# Altium PCB PCB_BAD.PcbDoc
Units mil, origin at the board's own origin, x right, y up, seen from the top; angles counter-clockwise.
Board outline 2100 x 3115 mil, 2 copper layers (Top Layer, Bottom Layer), stack 12.8 mil thick; 26 components, 12 nets, 116 pads, 29 vias.
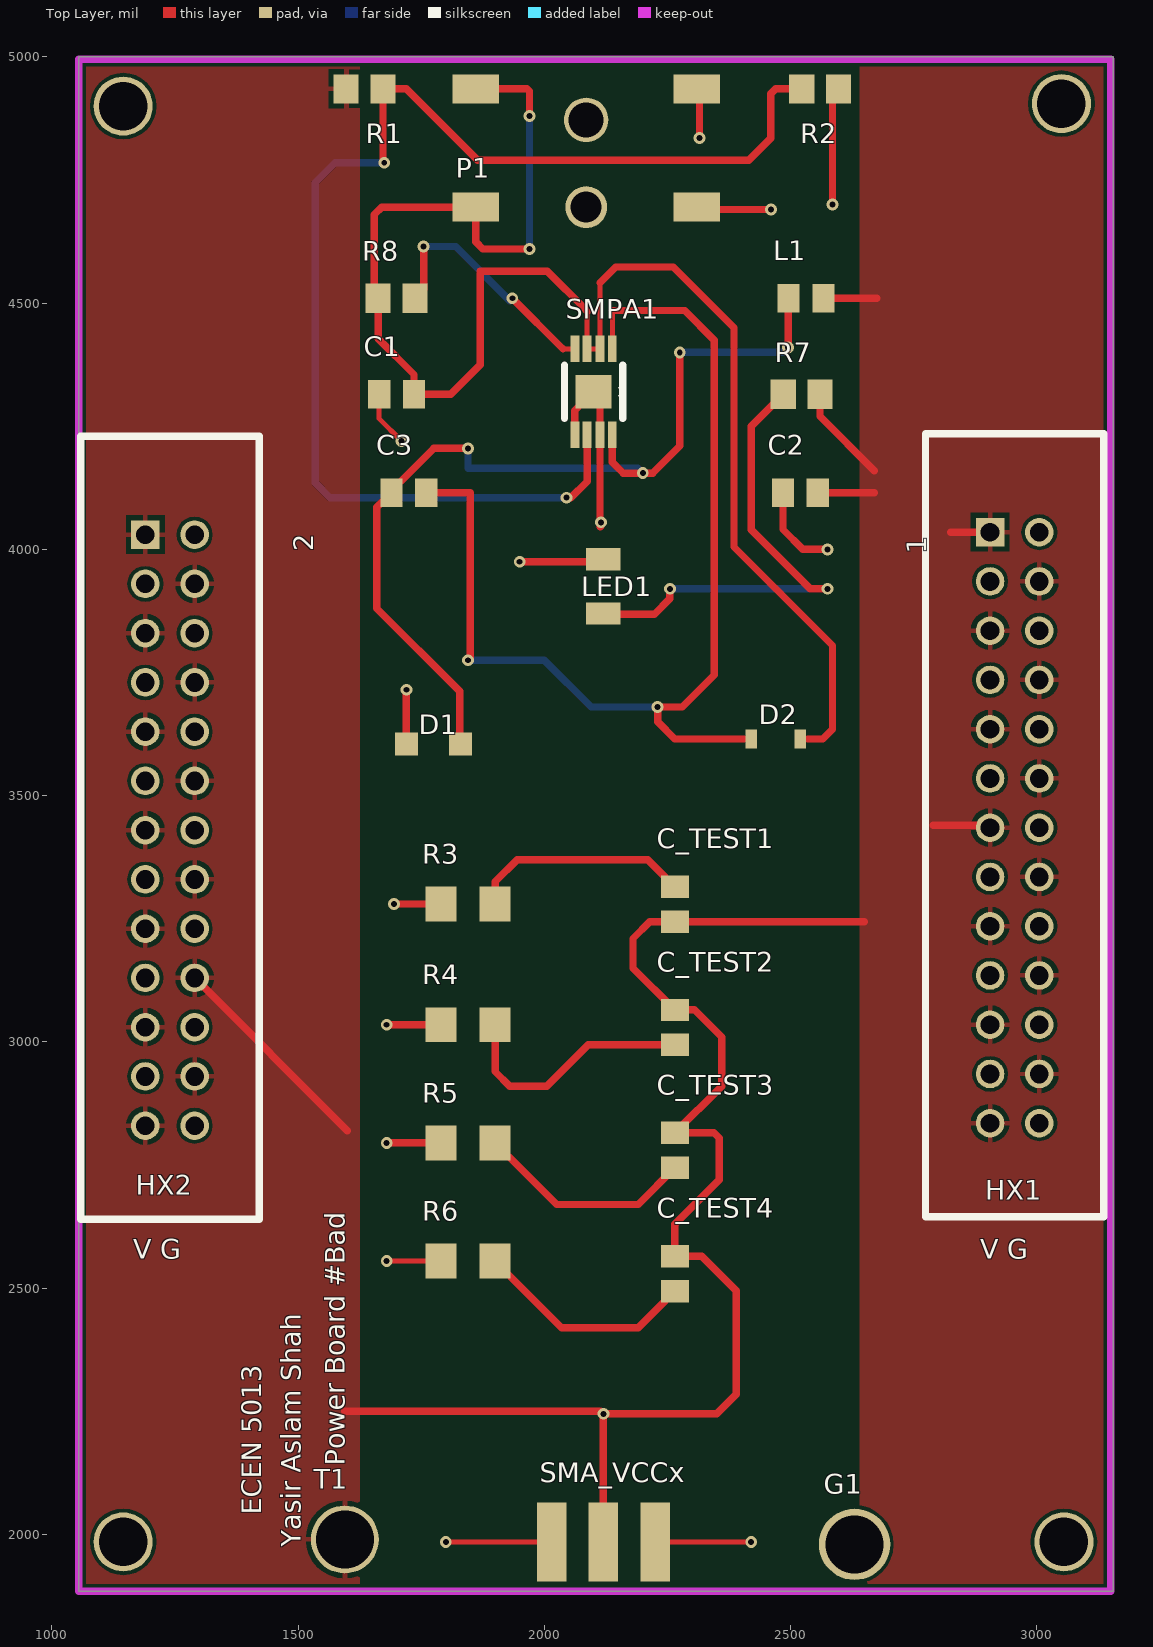
[diagram p0: Top Layer view]
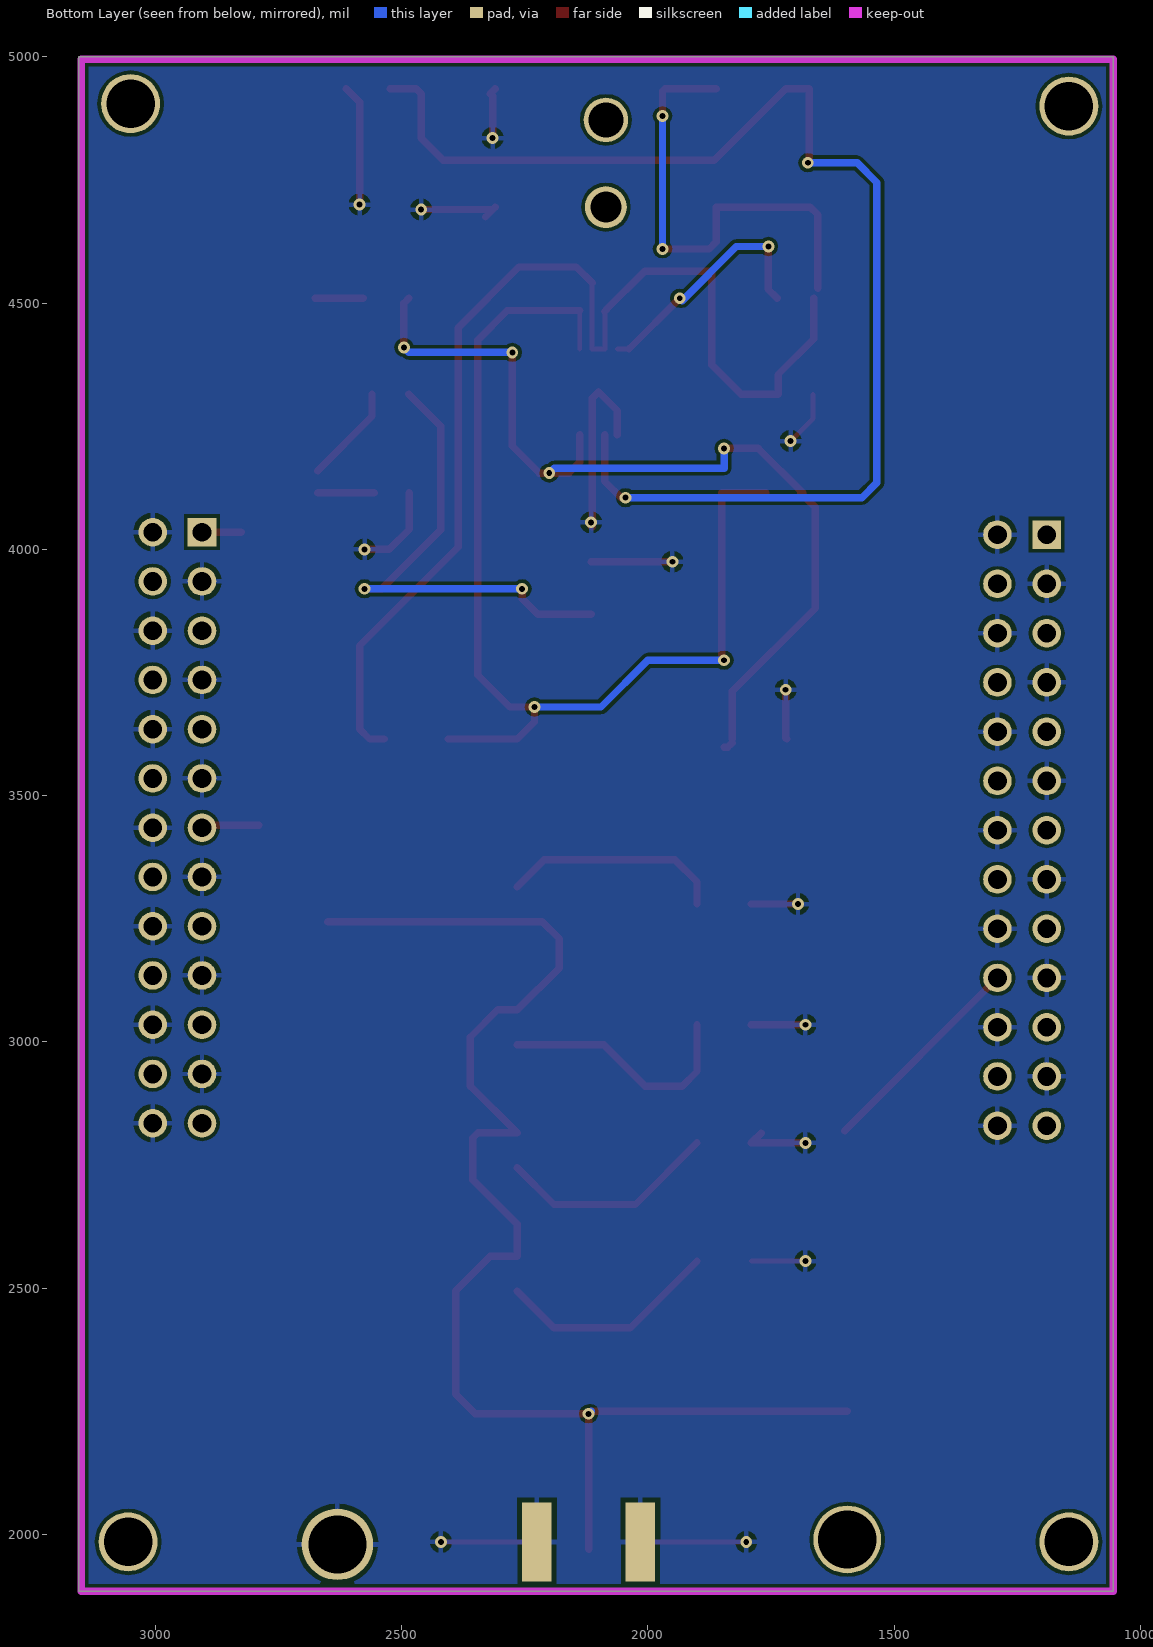
[diagram p1: Bottom Layer view, seen from below]

## Layer stack, top to bottom
Top Solder: solder mask 0.4, Solder Resist, Dk 3.5
Top Layer: signal copper 1.4
Dielectric 1: core 10, FR-4, Dk 4.2
Bottom Layer: signal copper 1.4
Bottom Solder: solder mask 0.4, Solder Resist, Dk 3.5

## Board outline
1055,1885 3155,1885 3155,5000 1055,5000

## Design rules (kind name [scope] priority, off if disabled: settings)
Clearance [All] p1: gap=7 ignorepadtopadclearanceinfootprint=FALSE
HoleSize [All] p1: absolutevalues=TRUE maxlimit=120 minlimit=1 maxpercent=80.000 minpercent=20.000
PolygonConnect [All] p1: connectstyle=Relief reliefconductorwidth=10 reliefentries=4 polygonreliefangle="90 Angle" airgapwidth=10
RoutingVias [All] p1: holewidth=12 width=24 viastyle="Through Hole" minholewidth=12 minwidth=24 maxholewidth=12 maxwidth=24
SolderMaskExpansion [All] p1: expansion=4
Width [All] p1: maxlimit=20 minlimit=10 preferedwidth=10 minimp=50.000000 maximp=50.000000 favimp=50.000000
29 further rules are at their usual default settings.

## Components (designator, comment, footprint, x,y, rotation, side; value= is the part's Value field where it differs from the comment)
C1 "Cap Semi" CAPC2012X140N 1700,4315 r0 top value=10uF
C2 "Cap Semi" CAPC2012X140N 2520,4115 r0 top value=10uF
C3 "Cap Semi" CAPC2012X140N 1725,4115 r0 top value=0.1uF
C_TEST1 "Cap Semi" CAPC2012X140N 2265,3279.57 r90 top value=100uF
C_TEST2 "Cap Semi" CAPC2012X140N 2265,3029.57 r90 top value=10uF
C_TEST3 "Cap Semi" CAPC2012X140N 2265,2780 r90 top value=1uF
C_TEST4 "Cap Semi" CAPC2012X140N 2265,2529.57 r90 top value=0.1uF
D1 "Diode" D11 1920,3575 r0 top
D2 "Diode" D22s 2320,3600 r180 top
G1 "VCCx" "1Pin Header"#1 2630,1980 r0 top
HX1 "" TYCO_1761606-9 3005,4035 r90 top
HX2 "" TYCO_1761606-9 1290,4030 r90 top
L1 "33uH" CAPC2012X140N 2531.26,4510 r0 top
LED1 "LED2" LED_User 2100,3775 r270 top
P1 "Power Jack" CUI_PJ-002AH-SMT-TR 2085,4815 r90 top
R1 "Res3" RESC2012X70 1635,4935 r0 top value=10K
R2 "Res3" RESC2012X70 2560,4935 r0 top value=10K
R3 "0 ohm" RESC3216X65 1844.88,3280 r180 top
R4 "0 ohm" RESC3216X65 1844.88,3035 r180 top
R5 "0 ohm" RESC3216X65 1844.88,2795 r180 top
R6 "0ohm" RESC3216X65 1844.88,2555 r180 top
R7 "Res3" RESC2012X70 2522.4,4315 r0 top value=1K
R8 "Res3" RESC2012X70 1700,4510 r0 top value=100K
SMA_VCCx "SMA1" sma_UserDefined 1860,2125 r180 top
SMPA1 "" SOP65P490X110-9N 2100,4320 r270 top
T1 "VCCx" "1Pin Header"#2 1595,1990 r0 top

## Footprints (in the part's own frame and the unit in brackets; to place one, negate y for a bottom-side part, rotate by r counter-clockwise, add the part's x,y. Pads: shape width x height; smd on the part's side, far side on the other; paste and mask are expansions set on the pad)
"1Pin Header"#1 [mil]
  round 145 hole 118.11: 1(0,0)
"1Pin Header"#2 [mil]
  round 137.8 hole 118.11: 1(0,0)
CAPC2012X140N [mm]
  rect 1.15x1.45 smd: 1(-0.9,0) 2(0.9,0)
CUI_PJ-002AH-SMT-TR [mm]
  rect 1.5x2.4 smd: 1(-3.05,5.7) 1(3.05,5.7) 2(-3.05,-5.7) 3(3.05,-5.7)
  round 2.159 hole 1.6 unplated: None(-3.05,0)
  round 2.286 hole 1.8 unplated: None(1.45,0)
D11 [mm]
  rect 1.2x1.2 smd: 1(-5.08,0.762) 2(-2.286,0.762)
D22s [mm]
  rect 0.59x1 smd: 1(-5.08,-0.381) 2(-2.54,-0.381)
LED_User [mil]
  rect 45x70 smd: 1(-95,20) 2(-205,20)
RESC2012X70 [mm]
  rect 1.3x1.5 smd: 1(-0.95,0) 2(0.95,0)
RESC3216X65 [mm]
  rect 1.6x1.8 smd: 1(-1.4,0) 2(1.4,0)
sma_UserDefined [mil]
  rect 60x160 smd: GND1(-365,140) GND4(-155,140) P(-260,140)
  rect 60x160 smd far side: GND2(-365,140) GND3(-155,140)
SOP65P490X110-9N [mil]
  rect 54x18 smd: 1(-87,38) 2(-87,13) 3(-87,-13) 4(-87,-38) 5(87,-38) 6(87,-13) 7(87,13) 8(87,38)
  rect 68x73 smd: 9(0,0)
  silkscreen extent -54,-59 54,59
TYCO_1761606-9 [mil]
  rect 58x58 hole 38: 1(0,100)
  round 58 hole 38: 2(0,0) 3(-100,100) 4(-100,0) 5(-200,100) 6(-200,0) 7(-300,100) 8(-300,0) 9(-400,100) 10(-400,0) 11(-500,100) 12(-500,0) 13(-600,100) 14(-600,0) 15(-700,100) 16(-700,0) 17(-800,100) 18(-800,0) 19(-900,100) 20(-900,0) 21(-1000,100) 22(-1000,0) 23(-1100,100) 24(-1100,0) 25(-1200,100) 26(-1200,0)
  silkscreen extent -1390,-131 200,231

## Part data
C1 C2 C3 C_TEST1 C_TEST2 C_TEST3 C_TEST4: "Capacitor (Semiconductor SIM Model)", LatestRevisionDate=29-May-2009, LatestRevisionNote="IPC-7351 Footprint Added.", PackageDescription="Chip Capacitor", PackageReference=C1206, Published=8-Jun-2000, Publisher="Altium Limited"
D1 D2: "Default Diode", Code_JEDEC=DO-214-AB, LatestRevisionDate=17-Jul-2002, LatestRevisionNote="Re-released for DXP Platform.", PackageDescription="DO-214-AB/SMC; 2 C-Bend Leads; Body 7.9 x 5.9 mm, inc. leads (LxW)", PackageReference=SMC, PackageVersion=Sep-1996, Published=8-Jun-2000, Publisher="Altium Limited"
G1 T1: library part "1Pin Header"
HX1 HX2: library part 1761606-9, "Header, Pin, Idc, Amp-Latch, 26 Pos, Low Profile, Pcb, Vertical, Black", Package=None, Availability=Good, EU_RoHS_Compliance=Compliant, Link=http://www.te.com/usa-en/product-1761606-9.html, MF="TE Connectivity", MP=1761606-9, Price="4.02 USD", SnapEDA_Link=https://www.snapeda.com/symbols-footprints/1761606-9/TE%20Connectivity%20AMP%20Connectors/view-part/?ref=snap
L1: library part MLP2012H2R2MT0S1, "Inductor Power Shielded Multi-Layer 2.2uH 20% 2MHz Ferrite 1A 195mOhm DCR 0805 Punched Paper T/R", Package="0805 TDK", Availability=Good, MF=TDK, MP=MLP2012H2R2MT0S1, Price="0.18 USD", SnapEDA_Link=https://www.snapeda.com/symbols-footprints/MLP2012H2R2MT0S1/TDK-Lambda%20Americas%20Inc/view-part/?ref=snap
LED1: "Typical RED, GREEN, YELLOW, AMBER GaAs LED", LatestRevisionDate=17-Jul-2002, LatestRevisionNote="Re-released for DXP Platform.", PackageDescription="SM LED; 2 Flat Leads", PackageReference=3.2X1.6X1.1, PackageVersion=Feb-2002, Published=8-Jun-2000, Publisher="Altium Limited"
P1: library part PJ-002AH-SMT-TR, "24 VDC 5 A Surface Mount Unshielded 2 Conductors 3 Contacts Male Power Jack", Package=None, Availability=Good, MF=CUI, MP=PJ-002AH-SMT-TR, Price="1.03 USD", SnapEDA_Link=https://www.snapeda.com/symbols-footprints/PJ-002AH-SMT-TR/CUI%20Inc/view-part/?ref=snap
R1 R2 R7 R8: "Resistor", LatestRevisionDate=29-May-2009, LatestRevisionNote="IPC-7351 Footprint Added.", PackageDescription="Chip Resistor", PackageReference=J1-0603, Published=8-Jun-2000, Publisher="Altium Limited"
R3 R4 R5 R6: library part Res3, "Resistor", LatestRevisionDate=29-May-2009, LatestRevisionNote="IPC-7351 Footprint Added.", PackageDescription="Chip Resistor", PackageReference=J1-0603, Published=8-Jun-2000, Publisher="Altium Limited"
SMA_VCCx: library part 1865, "Edge-Launch SMA Connector for 1.6mm / 0.062 Thick PCBs", Package=None, Availability=Bad, MF=Keystone, MP=1865, Price="2.38 USD", SnapEDA_Link=https://www.snapeda.com/symbols-footprints/1865/Keystone%20Electronics/view-part/?ref=snap
SMPA1: library part LM2738XMY, "Swx Reg, Step d, Dc-Dc, 1.5a, 8soic", Package="SOIC-8 Texas Instruments", Availability=Unavailable, MF="Texas Instruments", MP=LM2738XMY, Price=None, SnapEDA_Link=https://www.snapeda.com/symbols-footprints/LM2738XMY/Texas%20Instruments/view-part/?ref=snap

## Free pads (board coordinates)
  round 120 hole 98.43: 2(1145,1985) 2(1145,4900) 2(3050,4905) 2(3055,1985)

## Via types
v1: diameter 24, hole 12, Top Layer to Bottom Layer, 29 vias

## Nets (pads, with @x,y where several pads share a name; then routed paths per layer and width w, separated by ;. In a path a pad name is that pad's centre, name@x,y a point inside that pad or via, vN(x,y) a via of type N, cw(c..) or ccw(c..) an arc to the next point about the centre after c; other vN are vias at no path point)
GND: C1.1 C2.1 D1.1 G1.1 HX1.2 HX1.3 HX1.6 HX1.7 HX1.10 HX1.11 HX1.14 HX1.15 HX1.18 HX1.19 HX1.22 HX1.23 HX1.26 HX2.2 HX2.3 HX2.6 HX2.7 HX2.10 HX2.11 HX2.14 HX2.15 HX2.18 HX2.19 HX2.22 HX2.23 HX2.26 LED1.2 P1.2 P1.3 R2.2 R3.2 R4.2 R5.2 R6.2 SMA_VCCx.GND1 SMA_VCCx.GND2 SMA_VCCx.GND3 SMA_VCCx.GND4 SMPA1.5 SMPA1.7 SMPA1.9 | length 2342.3
  Top Layer w10: C1.1 1664.57,4265.43 v1(1710,4220) ; v1(1680,2555) R6.2 ; v1(1800,1985) SMA_VCCx.GND4 ; SMA_VCCx.GND1 v1(2420,1985)
  Top Layer w15: v1(1680,2795) R5.2 R5.2@1769.76,2815 ; v1(1680,3035) R4.2 ; v1(1695,3280) R3.2 ; D1.1@1718.07,3615 1720,3616.93 v1(1720,3715) ; v1(1950,3975) LED1.2@2115,3975 ; SMPA1.5 2062,4282 SMPA1.9 2113,4307 SMPA1.7 v1@2113,4046 ; v1@2114,4046 2115,4047 v1(2115,4055) ; P1.2 P1.2@2314.33,4690 ; P1.3 2309.92,4935.08 2320,4925 2315,4920 v1(2315,4835) ; P1.2@2329.33,4675 P1.2@2314.33,4690 ; v1(2460,4690) P1.2@2314.33,4690 ; C2.1 2484.57,4040.43 2525,4000 v1(2575,4000) ; v1(2585,4700) 2585,4907.6 R2.2@2612.4,4935
NetC3_1: C3.1 D1.2 L1.1 SMPA1.8 | length 1941.6
  Top Layer w15: C3.1@1685.65,4115 1775.65,4205 v1(1845,4205) ; C3.1 1660,4085.43 1660,3880 1828.31,3711.69 D1.2@1828.31,3615 ; D1.2@1828.31,3607.65 1837.96,3598 D1.2@1845,3598 ; SMPA1.8 2138,4177 2160,4155 v1(2200,4155) 2220,4155 2275,4210 v1(2275,4400) ; L1.1@2485,4510 2495,4500 v1(2495,4410)
  Bottom Layer w15: v1(1845,4205) 1845,4165 2190,4165 v1(2200,4155) ; v1(2275,4400) 2485,4400 v1(2495,4410)
NetC3_2: C3.2 D2.2 SMPA1.1 | length 2207.5
  Top Layer w10: SMPA1.1 2138,4485
  Top Layer w15: C3.2 1850,4115 1850,3780 v1(1845,3775) ; 2138,4485 2285,4485 2345,4425 2345,3745 2280,3680 v1(2230,3680) 2230,3650 2265,3615 2405.24,3615
  Bottom Layer w15: v1(1845,3775) 2000,3775 2095,3680 v1(2230,3680)
NetC_TEST1_2: C_TEST1.2 R3.1 | length 451.4
  Top Layer w15: R3.1 1900,3325 1945,3370 2210,3370 C_TEST1.2
NetC_TEST2_1: C_TEST2.1 R4.1 | length 507.3
  Top Layer w15: R4.1 1900,2940 1930,2910 2005,2910 2089.13,2994.13 C_TEST2.1
NetC_TEST3_1: C_TEST3.1 R5.1 | length 447.7
  Top Layer w15: R5.1 2025,2670 2190.43,2670 C_TEST3.1
NetC_TEST4_1: C_TEST4.1 R6.1 | length 451.6
  Top Layer w15: R6.1 2035,2420 2190.87,2420 C_TEST4.1
NetLED1_1: LED1.1 R7.1 | length 999.6
  Top Layer w15: LED1.1@2115,3868.7 2223.7,3868.7 2255,3900 v1(2255,3920) ; R7.1 2420,4250 2420,4040 2540,3920 v1(2575,3920)
  Bottom Layer w15: v1(2255,3920) v1(2575,3920)
NetR1_2: R1.2 R2.1 SMPA1.6 | length 2613.8
  Top Layer w15: v1(1675,4785) 1672.4,4787.6 R1.2 1720,4935 1865,4790 2415,4790 2460,4835 2460,4925 2470,4935 R2.1 ; v1(2045,4105) 2054,4105 2087,4138 SMPA1.6
  Bottom Layer w15: v1(1675,4785) 1575,4785 1535,4745 1535,4135 1565,4105 v1(2045,4105)
NetR8_2: R8.2 SMPA1.4 | length 509.6
  Top Layer w10: 2038,4407 SMPA1.4
  Top Layer w15: R8.2 1755,4527.6 v1(1755,4615) ; v1(1935,4510) 2038,4407
  Bottom Layer w15: v1(1755,4615) 1820,4615 1930,4505 v1(1935,4510)
VCCx: C2.2 C_TEST1.1 C_TEST2.2 C_TEST3.2 C_TEST4.2 HX1.1 HX1.4 HX1.5 HX1.8 HX1.9 HX1.12 HX1.13 HX1.16 HX1.17 HX1.20 HX1.21 HX1.24 HX1.25 HX2.1 HX2.4 HX2.5 HX2.8 HX2.9 HX2.12 HX2.13 HX2.16 HX2.17 HX2.20 HX2.21 HX2.24 HX2.25 L1.2 R1.1 R7.2 SMA_VCCx.P T1.1 | length 3905.5
  Top Layer w15: HX2.20 1600,2820 ; 1595,2250 2115,2250 v1(2120,2245) ; SMA_VCCx.P@2120,1970 SMA_VCCx.P v1(2120,2245) ; C2.2 2670,4115 ; R7.2 2559.8,4270.2 2670,4160 ; L1.2@2577.52,4510 2675,4510 ; 2650,3244.13 C_TEST1.1 2214.13,3244.13 2180,3210 2180,3150 C_TEST2.2 2305,3065 2360,3010 2360,2910.43 C_TEST3.2 2344.57,2815.43 2355,2805 2355,2720 2265,2630 C_TEST4.2 2320,2565 2390,2495 2390,2285 2350,2245 v1(2120,2245) ; 2790,3440 2910,3440 HX1.13 ; 2825,4035 HX1.1
  Bottom Layer w15: v1@2115,2250 v1(2120,2245)
VIN: C1.2 D2.1 P1.1 R8.1 SMPA1.2 SMPA1.3 | length 3334.3
  Top Layer w10: 2087,4483 SMPA1.3 SMPA1.2 2113,4541.28
  Top Layer w15: R8.1@1655,4530 1655,4680 1669.92,4694.92 1860.59,4694.92 1860.59,4624.41 1875,4610 v1(1970,4610) ; R8.1 1662.6,4427.83 1735.43,4355 C1.2 1810,4315 1870,4375 1870,4565 2006.11,4565 2084,4487.11 2084,4486 2087,4483 ; P1.1@1860.59,4935.08 1964.92,4935.08 1970,4930 v1(1970,4880) ; 2113,4541.28 2145,4573.28 2261.72,4573.28 2385,4450 2385,4005 2585,3805 2585,3635 2565,3615 2534.76,3615
  Bottom Layer w15: v1(1970,4610) v1(1970,4880)
pads on no net: P1.None

## Polygon pours and split planes (outlines as drawn)
VCCx on Top Layer "as" (solid, pour order 0): 1055,4995 1625,4995 1625,1885 1055,1885
VCCx on Top Layer "as" (solid, pour order 4): 3155,5000 2640,5000 2640,4950 2640,1885 3155,1885 3155,1890
GND on Bottom Layer "as" (solid, pour order 8): 1055,4995 3150,4995 3150,1885 1055,1885

## Keep-outs
Keep-Out Layer:
  lines w15: 1055,1885 3150,1885 3150,4995 1055,4995 1055,1885

## Silkscreen, mask and mechanical layers (free items; w line width, h text height)
Top Overlay:
  text "V G" at 1165,2560 h40
  text "V G" at 2885,2560 h40
  text "Power Board #Bad" at 1595,2140 h40 r90
  text "ECEN 5013" at 1425,2040 h40 r90
  text "Yasir Aslam Shah" at 1505,1975 h40 r90

## Text inside footprints (layer, text, board x,y; h text height)
HX1: Top Overlay "1" at 2775.25,3990.89 h40 r90; Mechanical 1 "1" at 2775.65,3990.96 h40 r90
HX2: Top Overlay "2" at 1530.46,3995.91 h40 r90; Mechanical 1 "2" at 1530.46,3995.91 h40 r90